# Altium PCB PCB_V1.PcbDoc
Units mm, origin at the board's own origin, x right, y up, seen from the top; angles counter-clockwise.
Board outline 74.31 x 87.25 mm, 4 copper layers (Top Layer, Layer 2, Layer 3, Bottom Layer), stack 0.775 mm thick; 58 components, 48 nets, 175 pads, 9 vias.
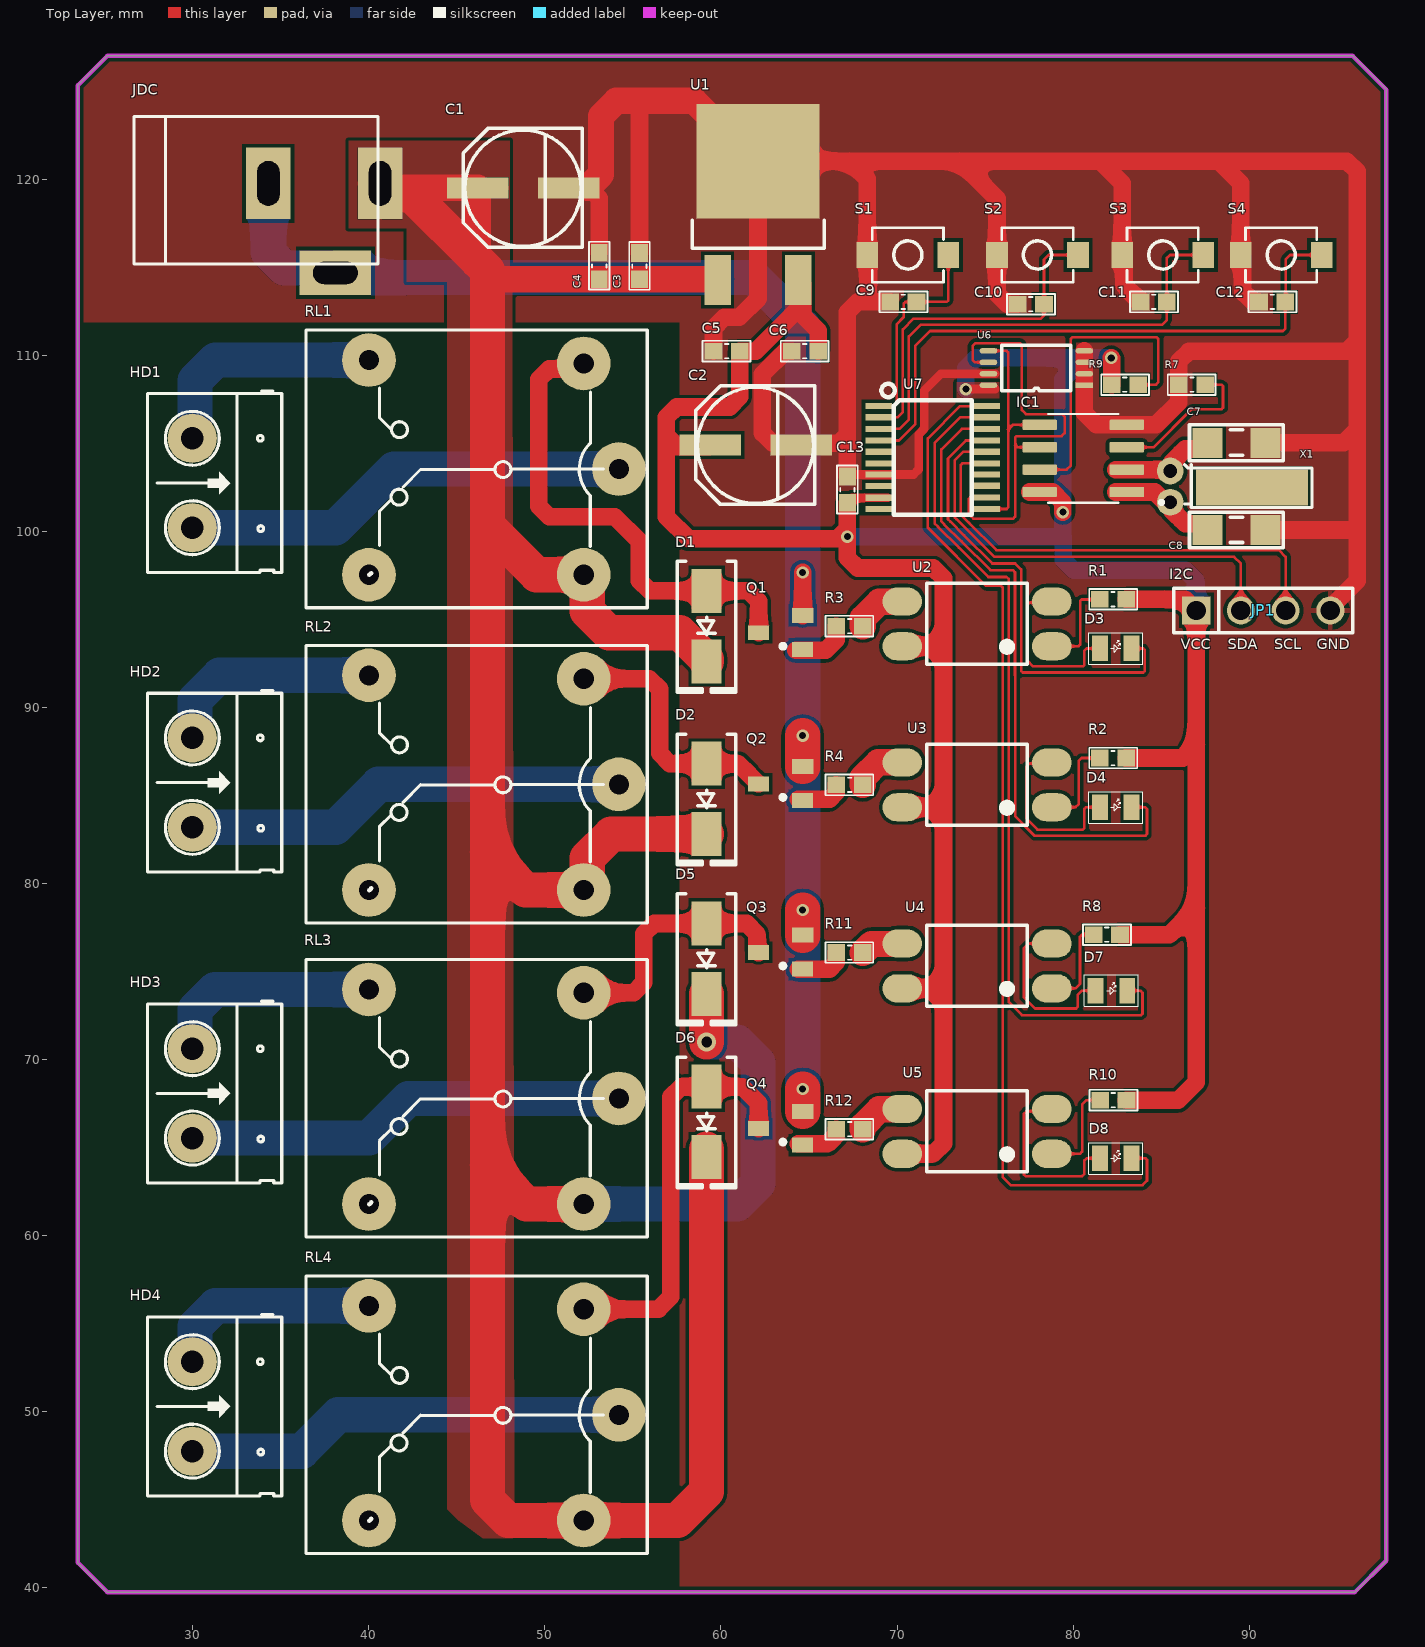
[diagram p0: Top Layer view]
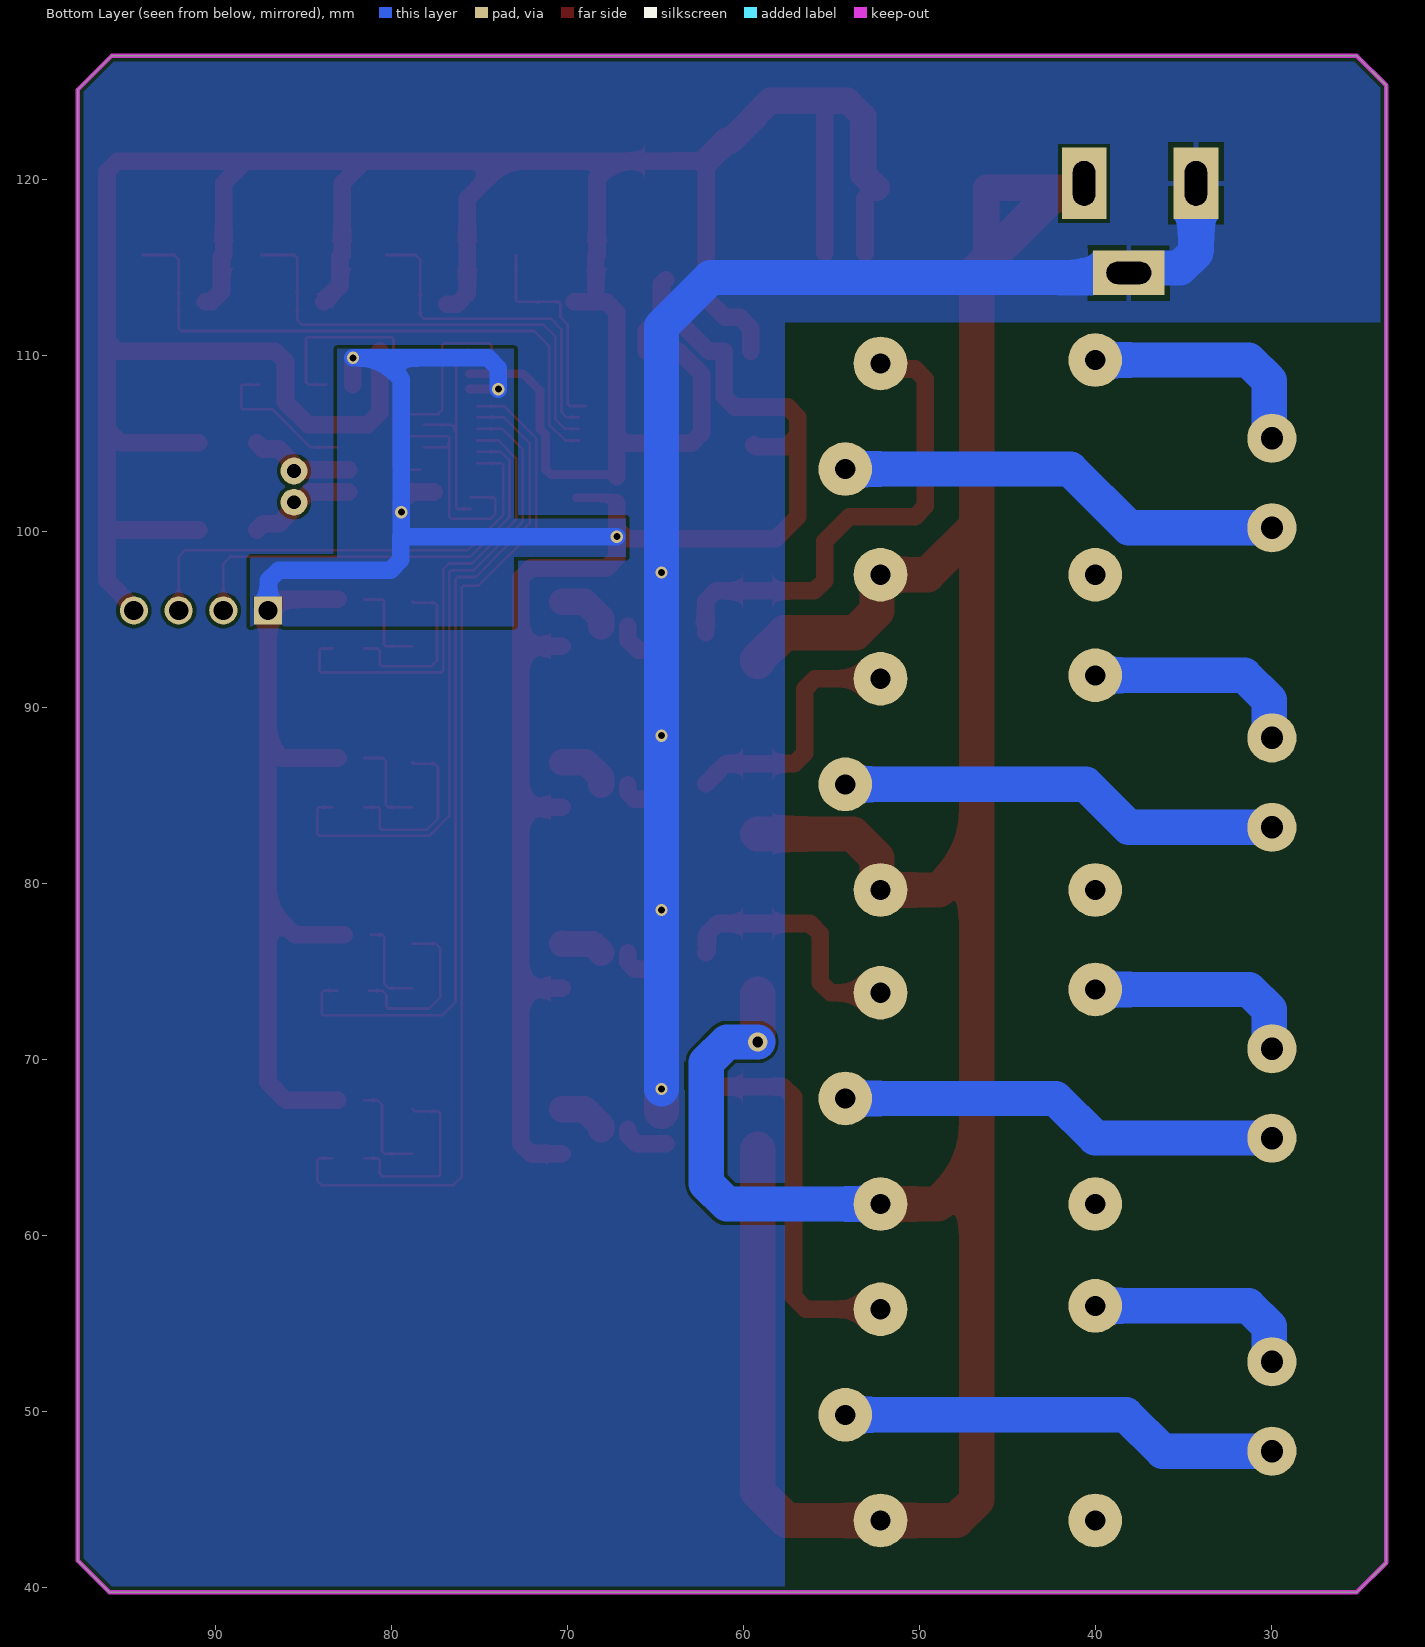
[diagram p1: Bottom Layer view, seen from below]
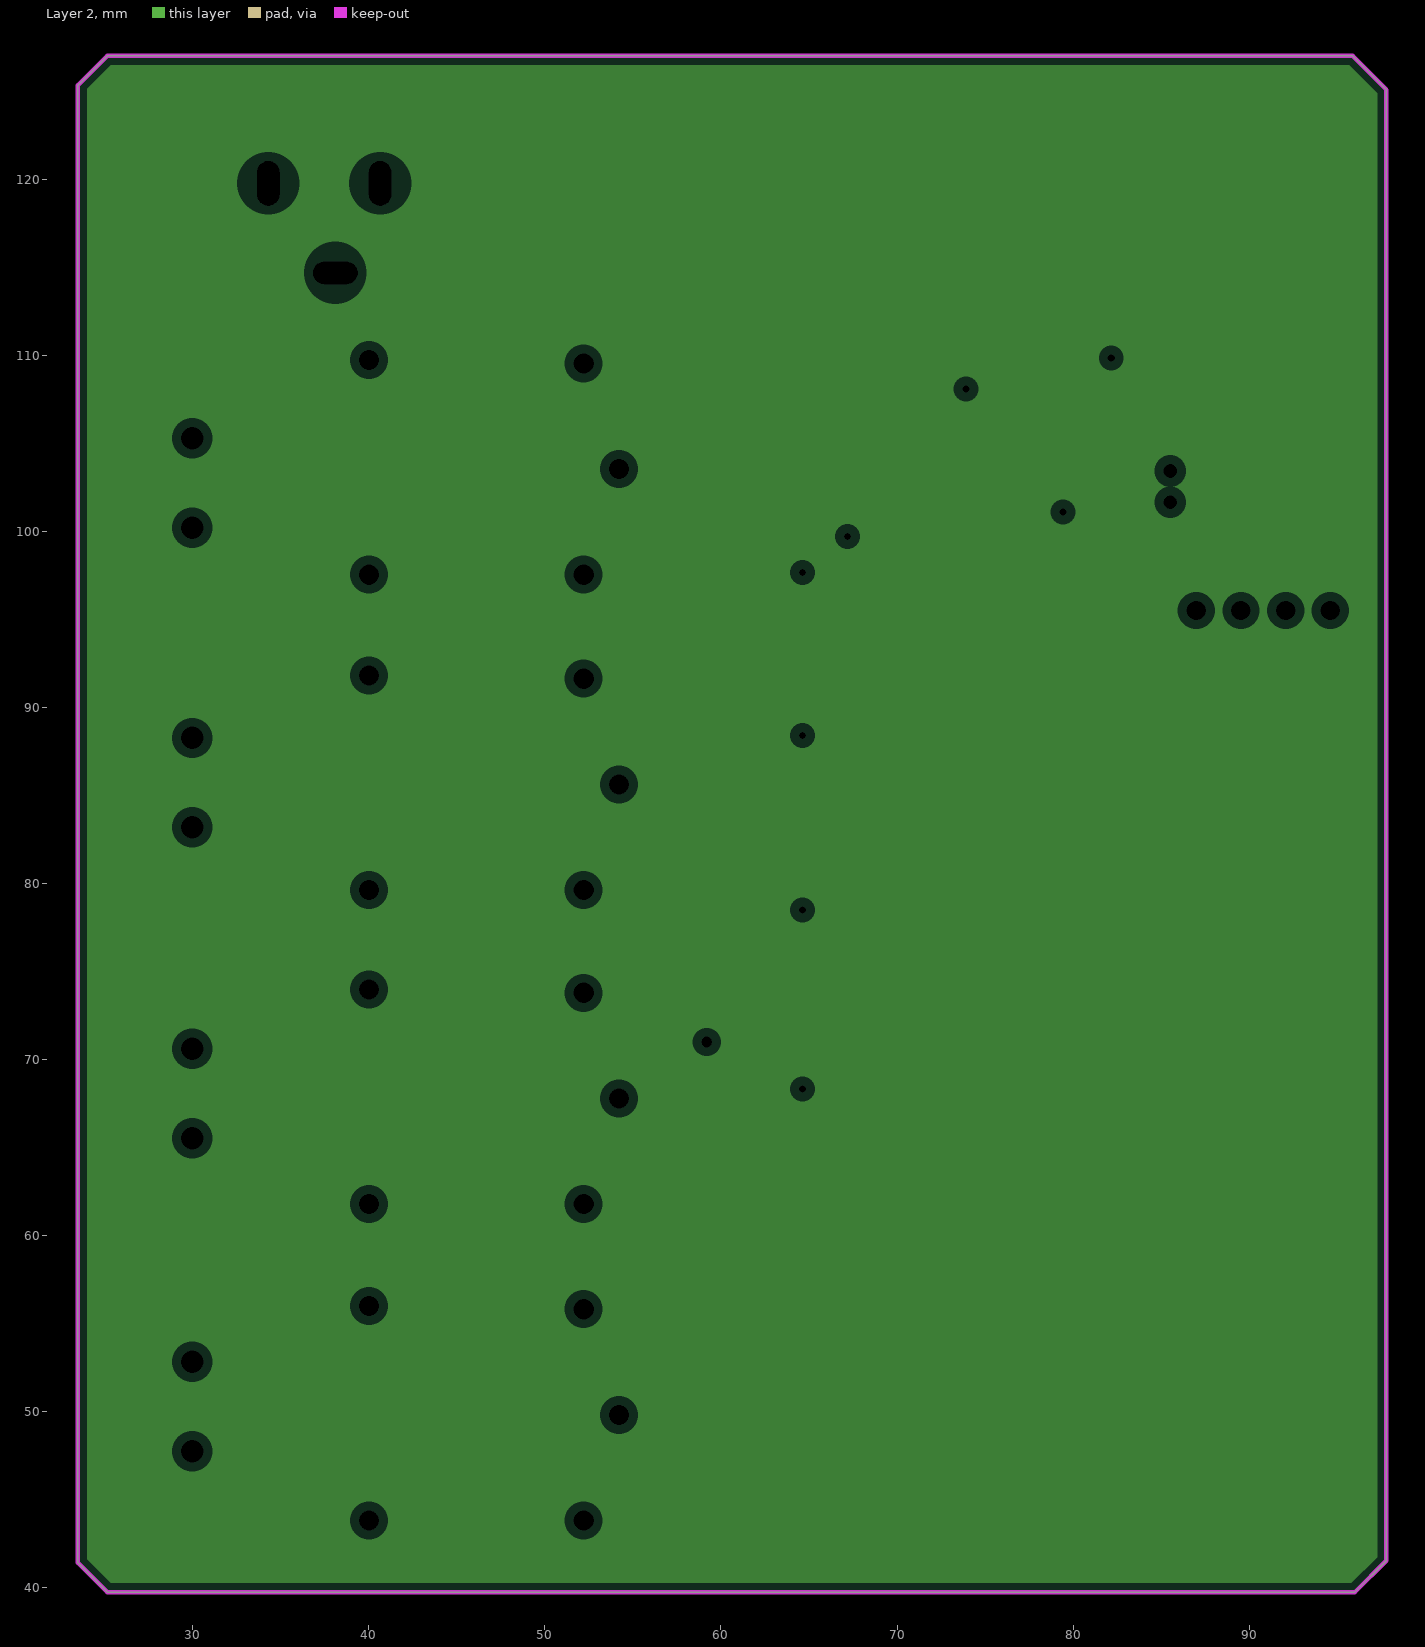
[diagram p2: Layer 2, clearances drawn from the general rule]
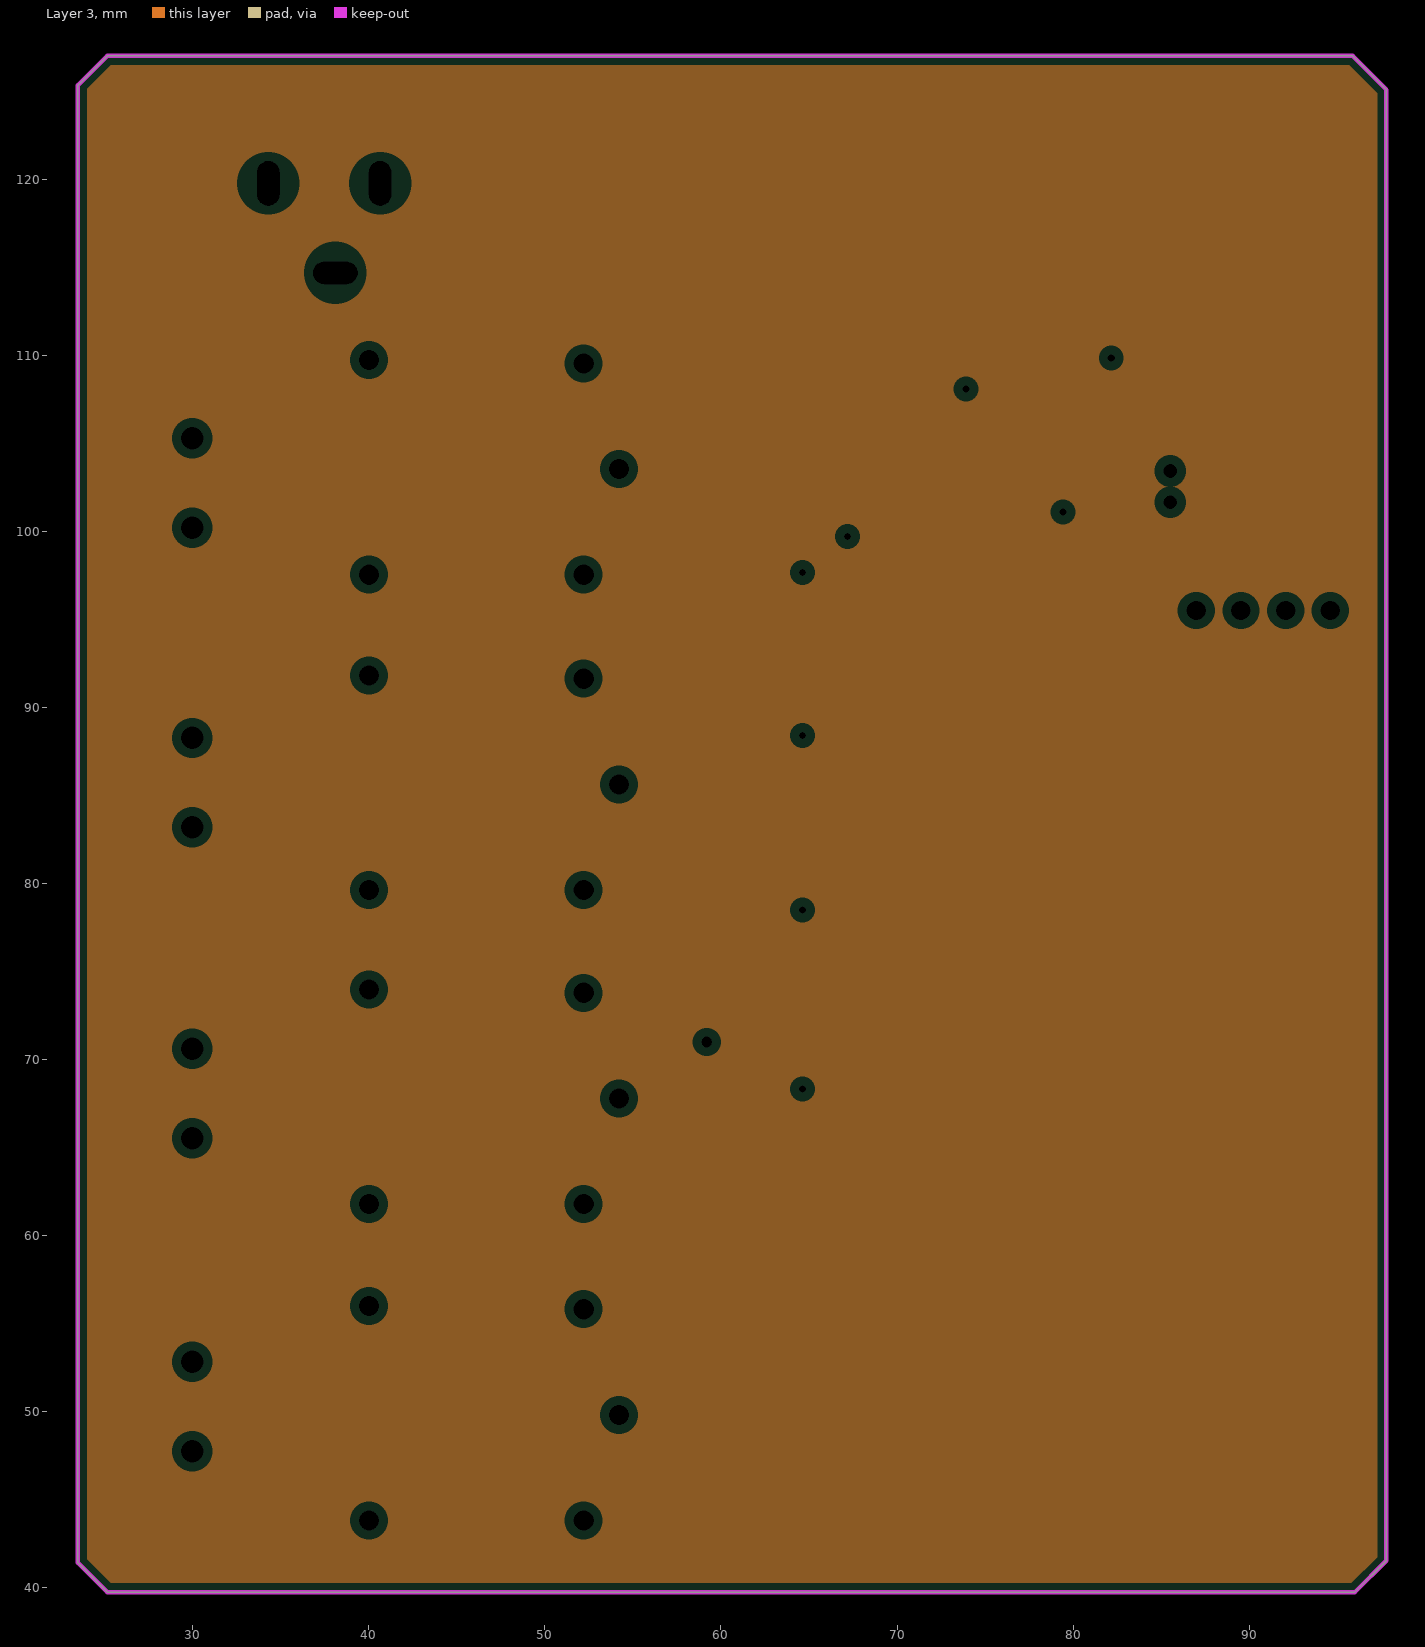
[diagram p3: Layer 3, clearances drawn from the general rule]
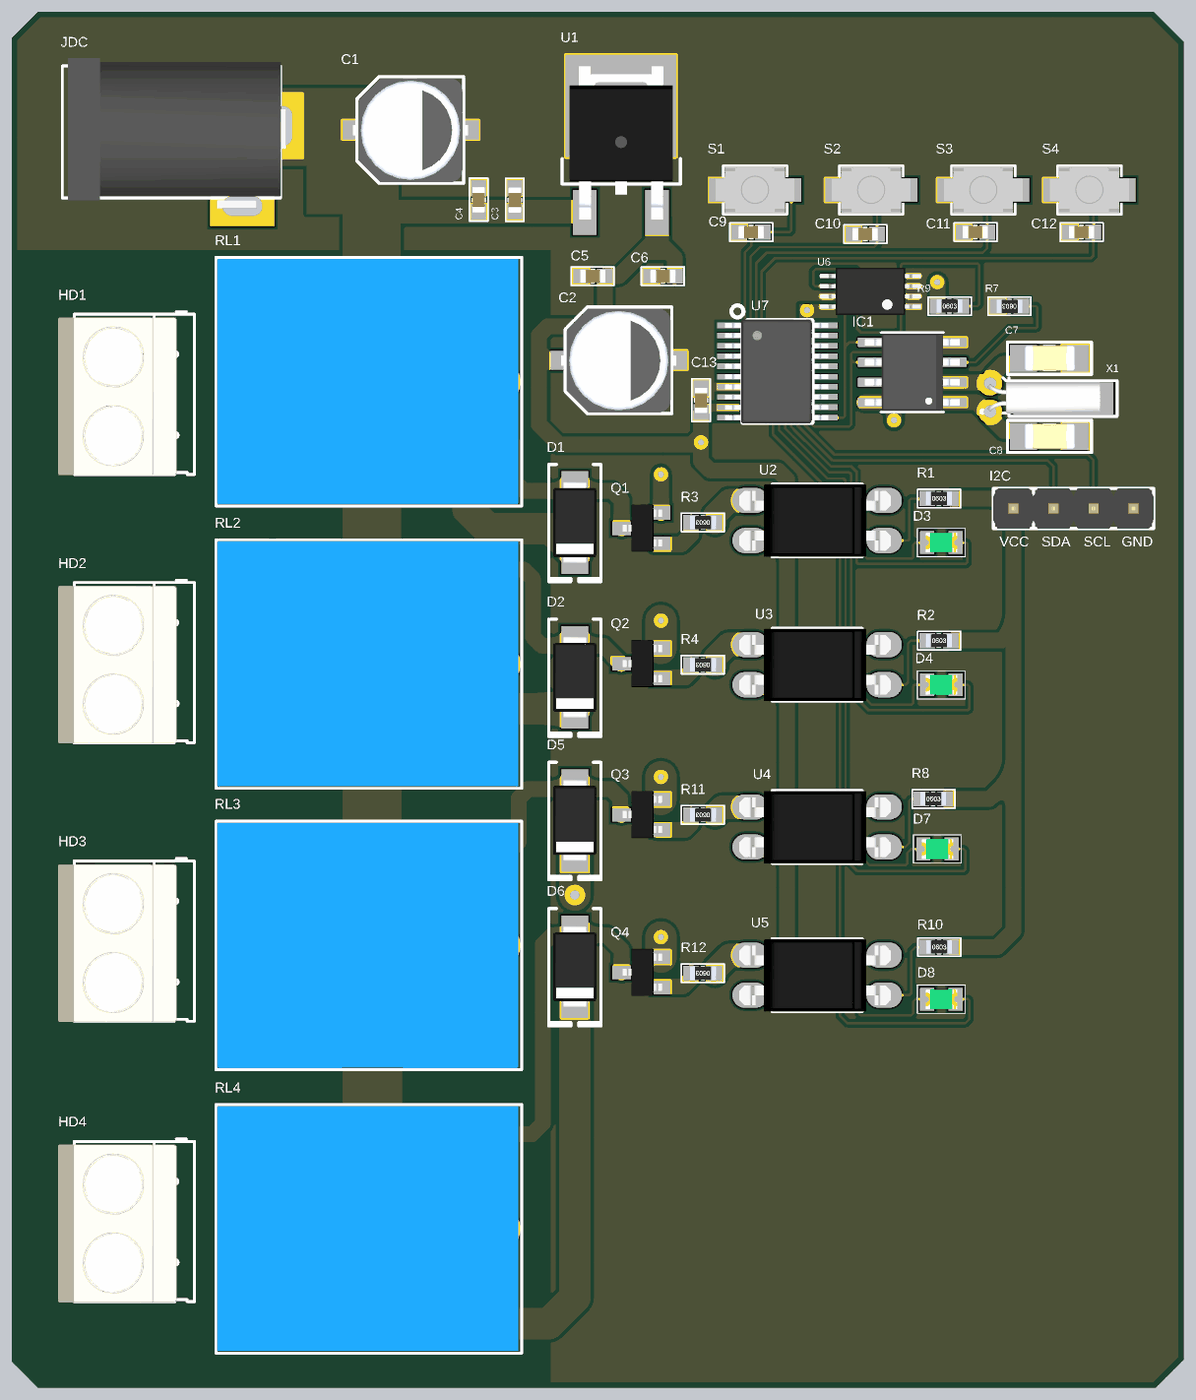
[diagram p4: 3D render of the assembled board from above, using the file's embedded part models]

## Layer stack, top to bottom
Top Solder: solder mask 0.0102, Solder Resist, Dk 3.5
Top Layer: signal copper 0.035
Dielectric 2: core 0.254, Core-028, Dk 4.3
Layer 2: plane copper 0.035
Dielectric 1: prepreg 0.127, PP-017, Dk 4.3
Layer 3: plane copper 0.035
Dielectric 3: core 0.254, Core-028, Dk 4.3
Bottom Layer: signal copper 0.035
Bottom Solder: solder mask 0.0102, Solder Resist, Dk 3.5

## Board outline
25.146,39.751 23.479,41.418 23.479,125.333 25.146,127 95.885,127 97.79,125.095 97.79,41.529 96.012,39.751

## Design rules (kind name [scope] priority, off if disabled: settings)
Clearance [All] p1: gap=0.2 ignorepadtopadclearanceinfootprint=FALSE
PlaneClearance [All] p1: clearance=0.508
PlaneConnect [All] p1: planeconnectstyle=Relief reliefexpansion=0.508 reliefentries=4 reliefconductorwidth=0.254 reliefairgap=0.254
PolygonConnect [All vs InNetClass('GND')] p1: thpad.connectstyle=Relief thpad.reliefconductorwidth=0.3 thpad.reliefentries=4 thpad.polygonreliefangle="90 Angle" thpad.airgapwidth=0.3 smdpad.connectstyle=Direct smdpad.reliefconductorwidth=0.3 smdpad.reliefentries=4 smdpad.polygonreliefangle="90 Angle" smdpad.airgapwidth=0.3 via.connectstyle=Relief via.reliefconductorwidth=0.3 via.reliefentries=4 via.polygonreliefangle="90 Angle" via.airgapwidth=0.3
RoutingVias RoutingVias_Power [InNetClass('Power')] p1: holewidth=0.4 width=0.7 viastyle="Through Hole" minholewidth=0.4 minwidth=0.7 maxholewidth=0.6 maxwidth=1.1
RoutingVias RoutingVias_Signal [All] p2: holewidth=0.4 width=0.7 viastyle="Through Hole" minholewidth=0.4 minwidth=0.7 maxholewidth=0.4 maxwidth=0.7
SolderMaskExpansion [All] p1: expansion=0.102 istentingtop=FALSE
Width Width_Power [InNetClass('Power')] p1: maxlimit=2 minlimit=0.3 preferedwidth=0.5
Width Width_Signal [All] p2: maxlimit=0.5 minlimit=0.15 preferedwidth=0.15
28 further rules are at their usual default settings.

## Classes and differential pairs
net class GND: GND_A GND_B
net class Power: 12VDC +5V GND_A GND_B NetC7_1 NetC8_1 NetD1_1 NetD2_1 NetD5_1 NetD6_1 NetHD1_1 NetHD1_2 NetHD2_1 NetHD2_2 NetHD3_1 NetHD3_2 NetHD4_1 NetHD4_2 NetQ1_1 NetQ2_1 NetQ3_1 NetQ4_1 NetR3_1 NetR4_1 NetR11_1 NetR12_1

## Components (designator, comment, footprint, x,y, rotation, side; value= is the part's Value field where it differs from the comment)
C1 "100uF/16V" ALUMINUM_7mm 48.768,119.507 r90 top
C2 "100uF/16V" ALUMINUM_7mm 61.976,104.902 r90 top
C3 "104" "tu 0603" 55.372,115.062 r90 top
C4 "103" "tu 0603" 53.086,115.074 r90 top
C5 "103" "tu 0603" 60.325,110.236 r180 top
C6 "104" "tu 0603" 64.77,110.236 r180 top
C7 "22pF" "tu 1206" 89.281,105.029 r0 top
C8 "22pF" "tu 1206" 89.281,100.076 r0 top
C9 "104" "tu 0603" 70.358,113.03 r0 top
C10 "104" "tu 0603" 77.597,112.903 r0 top
C11 "104" "tu 0603" 84.582,113.03 r0 top
C12 "104" "tu 0603" 91.313,113.03 r0 top
C13 "104" "tu 0603" 67.183,102.362 r90 top
D1 "1N4007" "DIODE SMA" 59.182,94.615 r270 top
D2 "1N4007" "DIODE SMA" 59.182,84.804 r270 top
D3 "LED_0805_GREEN" LED_0805_GREEN 82.429,93.345 r270 top
D4 "LED_0805_GREEN" LED_0805_GREEN 82.429,84.328 r270 top
D5 "1N4007" "DIODE SMA" 59.182,75.724 r270 top
D6 "1N4007" "DIODE SMA" 59.182,66.453 r270 top
D7 "LED_0805_GREEN" LED_0805_GREEN 82.18,73.914 r270 top
D8 "LED_0805_GREEN" LED_0805_GREEN 82.429,64.389 r270 top
HD1 "220VAC" HED2 29.972,105.283 r270 top value="Header 2"
HD2 "220VAC" HED2 29.972,88.265 r270 top value="Header 2"
HD3 "220VAC" HED2 29.972,70.612 r270 top value="Header 2"
HD4 "220VAC" HED2 29.972,52.832 r270 top value="Header 2"
IC1 "DS1307" DS1307 82.617,101.567 r180 top
JDC "Jac DC 12V" DC-IN 37.465,117.221 r0 top value="Jac DC"
JP1 "I2C" "JP 1x4 DT" 86.995,95.504 r0 top
Q1 "C1815 HF SMD" SOT23 63.393,94.234 r90 top value=C9014
Q2 "C1815 HF SMD" SOT23 63.393,85.649 r90 top value=C9014
Q3 "C1815 HF SMD" SOT23 63.393,76.073 r90 top value=C9014
Q4 "C1815 HF SMD" SOT23 63.393,66.071 r90 top value=C9014
R1 "330R" "tro smd 0603" 82.271,96.139 r0 top
R2 "330R" "tro smd 0603" 82.271,87.122 r0 top
R3 "2.2k" "tro smd 0603" 67.31,94.615 r180 top
R4 "2.2k" "tro smd 0603" 67.31,85.598 r180 top
R7 "10k" "tro smd 0603" 86.753,108.331 r180 top
R8 "330R" "tro smd 0603" 81.915,77.089 r0 top
R9 "4.7k" "tro smd 0603" 82.943,108.331 r0 top
R10 "330R" "tro smd 0603" 82.284,67.691 r0 top
R11 "2.2k" "tro smd 0603" 67.31,76.073 r180 top
R12 "2.2k" "tro smd 0603" 67.31,66.04 r180 top
RL1 "Relay" "Relay 5 Chan SRD" 54.205,103.536 r180 top
RL2 "Relay" "Relay 5 Chan SRD" 54.205,85.629 r180 top
RL3 "Relay" "Relay 5 Chan SRD" 54.205,67.787 r180 top
RL4 "Relay" "Relay 5 Chan SRD" 54.205,49.815 r180 top
S1 "PUSH_BUTTON_SMD_3X4X2" PUSH_BUTTON_SMD_3X4X2 70.612,115.697 r180 top
S2 "PUSH_BUTTON_SMD_3X4X2" PUSH_BUTTON_SMD_3X4X2 77.978,115.697 r180 top
S3 "PUSH_BUTTON_SMD_3X4X2" PUSH_BUTTON_SMD_3X4X2 85.09,115.697 r180 top
S4 "PUSH_BUTTON_SMD_3X4X2" PUSH_BUTTON_SMD_3X4X2 91.821,115.697 r180 top
U1 "L7805CDT-TR" DPAK_118_446_112X59_SMD 61.976,118.304 r90 top
U2 "OPTO PC817 SMD" SOP4 74.549,94.742 r180 top value=PC817
U3 "OPTO PC817 SMD" SOP4 74.549,85.598 r180 top value=PC817
U4 "OPTO PC817 SMD" SOP4 74.549,75.311 r180 top value=PC817
U5 "OPTO PC817 SMD" SOP4 74.549,65.913 r180 top value=PC817
U6 "AT24C02 - TSSOP8" AT24C02 80.645,108.301 r180 top
U7 "CH32V003F4P6" CH32V003F4P6 74.295,107.547 r270 top
X1 "32,768 Khz" XT32kn 85.446,101.219 r0 top value=32,768khz

## Footprints (in the part's own frame and the unit in brackets; to place one, negate y for a bottom-side part, rotate by r counter-clockwise, add the part's x,y. Pads: shape width x height; smd on the part's side, far side on the other; paste and mask are expansions set on the pad)
ALUMINUM_7mm [mm] "ALUMINUM CAPACITOR 7mm"
  rect 1.2x3.5 smd: 1(0,2.58) 2(0,-2.58)
  silkscreen extent -3.38,-3.36 3.38,3.4, body extent -3.32,-3.64 3.28,3.66, height 5.8
AT24C02 [mm] "TSSOP-8"
  rect 1x0.3 smd mask+0.05: 1(0,0)
  oval 1x0.3 smd mask+0.05: 2(0,-0.65) 3(0,-1.3) 4(0,-1.95) 5(5.45,-1.95) 6(5.45,-1.3) 7(5.45,-0.65) 8(5.45,0)
  silkscreen extent 0.78,-2.28 4.71,0.33, body extent -0.49,-2.47 5.91,0.53, height 1.2
CH32V003F4P6 [mm]
  rect 0.351x1.501 smd paste+0 mask+0.051: 1(0.435,-5.334) 2(1.07,-5.334) 3(1.731,-5.334) 4(2.391,-5.334) 5(3.026,-5.334) 6(3.687,-5.334) 7(4.322,-5.334) 8(4.982,-5.334) 9(5.642,-5.334) 10(6.277,-5.334) 11(6.277,0.812) 12(5.617,0.812) 13(4.957,0.812) 14(4.322,0.812) 15(3.687,0.812) 16(3.026,0.812) 17(2.391,0.812) 18(1.731,0.812) 19(1.07,0.812) 20(0.435,0.812)
  silkscreen extent -0.83,-5.18 6.61,-0.05, body extent 0.05,-5.59 6.65,0.96, height 1.2
DC-IN [mil] "Jac DC input"
  rect 100x160 hole 50 slot 100 at 90 deg: 1(125,100) 2(-125,100)
  rect 160x100 hole 50 slot 100 at 0 deg: 3(25,-100)
  silkscreen extent -425,-80 120,250, body extent -410,-105 134,269, height 434
"DIODE SMA" [mm] "SMA"
  rect 2.5x1.7 smd: 1(-2,0) 2(2,0)
  silkscreen extent -3.68,-1.65 3.75,1.65, body extent -2.6,-1.37 2.6,1.37, height 2.4
DPAK_118_446_112X59_SMD [mm] "CASE: DPAK"
  rect 2.85x1.5 smd: 1(-4.023,2.163) 3(-4.023,-2.417)
  rect 6.5x7 smd: 2(2.727,-0.127)
  silkscreen extent -2.22,-3.9 -0.62,3.6, body extent -4.47,-3.43 5.23,3.15, height 2.3
DS1307 [mm]
  rrect25% 1.97x0.59 smd: 1(-0.438,-0.668) 2(-0.438,-1.938) 3(-0.438,-3.208) 4(-0.438,-4.478) 5(4.512,-4.478) 6(4.512,-3.208) 7(4.512,-1.938) 8(4.512,-0.668)
  silkscreen extent -2.51,-5.09 4.04,0.02, body extent -0.96,-5.02 5.04,-0.12, height 1.75
HED2 [mil] "Header 2, 2 pin, hight 300mil, Pin to Pin 200, Colour Green"
  round 110 hole 50: 1(0,0) 2(200,0)
  silkscreen extent -106,-100 300,200, body extent -92,-140 302,155, height 394
"JP 1x4 DT" [mm] "4 pins, 1 row, straight, gold plating"
  rect 1.6x1.6 hole 1.1: 1(0,0)
  round 1.6 hole 1.1: 2(2.54,0) 3(5.08,0) 4(7.62,0)
  silkscreen extent -1.27,-1.27 8.89,1.27, body extent -1.27,-1.27 8.89,1.27, height 8.54
LED_0805_GREEN [mm]
  rect 1.45x0.9 smd: 1(0,-0.9) 2(0,0.9)
  silkscreen extent -0.89,-1.53 0.9,1.52, body extent -0.62,-1 0.63,1, height 1.1
PUSH_BUTTON_SMD_3X4X2 [mm]
  rect 1.23x1.5 smd: 1(-2.3,0) 2(2.3,0)
  silkscreen extent -2.03,-1.54 2.03,1.54, body extent -2.49,-1.45 2.51,1.45, height 2
"Relay 5 Chan SRD" [mil] "Relay SPDT, 5 pin, 10A,W 650mil, L 800mil, H 800mil"
  round 120 hole 45: 1(0,0) 2(559.06,236.22) 3(559.06,-243.78) 4(78.74,-236.22) 5(78.74,236.22)
  silkscreen extent -63,-311 700,310, body extent -55,-306 697,304, height 602
SOP4 [mm]
  oval 2.25x1.6 smd: 1(-4.25,1.27) 2(-4.25,-1.27) 3(4.25,-1.27) 4(4.25,1.27)
  silkscreen extent -2.85,-2.3 2.85,2.3, body extent -4.67,-2.29 4.93,2.31, height 3.6
SOT23 [mm] "SOT 23 _ 1-3-2"
  rect 0.85x1.2 smd: 1(-0.94,-1.245) 2(0.985,-1.25) 3(0.005,1.25)
  silkscreen extent -0.88,-0.25 -0.64,0, body extent -1.47,-1.33 1.53,1.17, height 1.06
"tro smd 0603" [mm] "Chip Capacitor, 2-Leads, Body 1,60x0,80mm, IPC Medium Density"
  rect 1x0.95 smd mask+0.076: 1(-0.75,0) 2(0.75,0)
  silkscreen extent -1.35,-0.58 1.37,0.58, body extent -0.82,-0.42 0.82,0.43, height 0.44
"tu 0603" [mm] "Chip Capacitor, 2-Leads, Body 1,60x0,80mm, IPC Medium Density"
  rect 1x0.95 smd mask+0.076: 1(-0.75,0) 2(0.75,0)
  silkscreen extent -1.35,-0.58 1.37,0.58, body extent -0.8,-0.4 0.8,0.4, height 0.9
"tu 1206" [mm]
  rect 1.7x1.7 smd: 1(-1.65,0) 2(1.65,0)
  silkscreen extent -2.67,-1.02 2.67,1.02, body extent -1.57,-0.8 1.63,0.8, height 0.94
XT32kn [mil] "Crystal for 32,768kHz, 2pin"
  round 60 hole 31: 1(3,17) 2(3,87)
  rect 250x80 smd: 3(186,50)
  silkscreen extent 35,5 320,101, body extent -3,12 279,91, height 90

## Part data
C1 C2: "Aluminum Capacitor 100uF/16V 7mm"
C3 C4 C5 C6 C9 C10 C11 C12 C13: library part "Tu 0603 104 50V 10%", "Dán", Chung_Loai=Dán, Don_Vi=Con, Ma_Hang=MH004568, So_Chan=2, Ten_Linh_Kien="Tụ 0603 104-100nF 10% 50V"
C7 C8: library part "Tu 1206 22pF 50V 10%", "Dán", Chung_Loai=Dán, Don_Vi=Con, Ma_Hang=MH004547, So_Chan=2, Ten_Linh_Kien="Tụ 1206 22P 10% 50V"
D1 D2 D5 D6: library part "Diode M7 ( 4007 )", "Dán", Chung_Loai=Dán, Don_Vi=Con, Ma_Hang=MH000944, Ten_Linh_Kien="Diode M7 1N4007 SMD 1A 1000V"
D3 D4 D7 D8: "LED 0805 Green.", JLCPCB PN=C2297
HD1 HD2 HD3 HD4: library part Hed2, "Header 2 (Green)"
JDC: library part DCIN, "Jac DC input"
JP1: library part "JP 1x4 2.54 Duc Thang", "Cắm", Chung_Loai=Cắm, Don_Vi=Con, Ma_Hang=MH000903, Ten_Linh_Kien="Jump Đơn Đực 2.54MM 1x40P Thẳng 11MM"
Q1 Q2 Q3 Q4: "NPN transistor"
R1 R2 R8 R10: library part "Tro 0603 5% 330R", "Dán", Chung_Loai=Dán, Don_Vi=Con, Ma_Hang=MH006910, So_Chan=2, Ten_Linh_Kien="Trở 0603 5% 330R"
R3 R4 R11 R12: library part "Tro 0603 5% 2.2k", "Dán", Chung_Loai=Dán, Don_Vi=Con, Ma_Hang=MH006321, So_Chan=2, Ten_Linh_Kien="Trở 0603 5% 2.2k"
R7: library part "Tro 0603 1% 10k", "Dán", Chung_Loai=Dán, Don_Vi=Con, Ma_Hang=MH006333, So_Chan=2, Ten_Linh_Kien="Trở 0603 1% 10k"
R9: library part "Tro 0603 5% 4.7k", "Dán", Chung_Loai=Dán, Don_Vi=Con, Ma_Hang=MH006327, So_Chan=2, Ten_Linh_Kien="Trở 0603 5% 4.7k"
RL1 RL2 RL3 RL4: library part "Relay 5 Chan SRD", "Relay 5 Chan", Ma_Hang=MH009374, Ten="Relay 5V10A SRD-05VDC-SL-C Chính Hãng"
S1 S2 S3 S4: "Push Button Tactile Switch SMD 2 Pins 3x4x2mm.", JLCPCB PN=C231644
U1: library part REG_35V_5V-1.5A-7.5W-DPAK, "Linear Voltage Regulator IC 1 Output 1.5A DPAK", Alternate Part Number-1="CJ7805 3%", Case/Package=DPAK, Manufacturer=Diodes, Manufacturer Part Number=L7805CDT-TR, Supplier Part Number-1=L7805CDT-TR, Supplier-1="SP ROAD"
U2 U3 U4 U5: "Single Opto"
U6: library part AT24C02
X1: library part XT32k, "Crystal 32,768kHz for timer real"

## Via types
v1: diameter 0.7, hole 0.4, Top Layer to Bottom Layer, 8 vias
v2: diameter 1.1, hole 0.6, Top Layer to Bottom Layer, 1 vias

## Nets (pads, with @x,y where several pads share a name; then routed paths per layer and width w, separated by ;. In a path a pad name is that pad's centre, name@x,y a point inside that pad or via, vN(x,y) a via of type N, cw(c..) or ccw(c..) an arc to the next point about the centre after c; other vN are vias at no path point)
12VDC: C1.1 C3.1 C4.1 D1.2 D2.2 D5.2 D6.2 JDC.1 RL1.5 RL2.5 RL3.5 RL4.5 U1.1 | length 197.4
  Top Layer w1.5: JDC.1 40.894,119.507 C1.1 46.188,115.356 46.188,115.102 46.736,114.554 ; 46.966,114.324 C4.1 C3.1@55.372,114.324 ; C3.1 U1.1@59.813,114.312
  Top Layer w2: JDC.1 40.64,119.388 40.91,119.118 42.426,119.118 46.188,115.356 46.736,114.808 46.736,114.554 ; 46.966,114.324 46.736,114.554 ; RL3.5 48.957,61.787 46.736,64.008 ; D6.2@59.182,64.897 D6.2 59.182,45.466 57.531,43.815 RL4.5 47.908,43.815 46.736,44.987 46.736,64.008 ; v2(59.182,70.993) D5.2 ; D2.2 53.771,82.804 52.406,81.438 52.406,79.83 RL2.5 48.895,79.629 46.736,81.788 ; D1.2 59.182,92.715 57.663,94.234 53.644,94.234 52.406,95.473 52.406,97.335 RL1.5 49.53,97.536 46.736,100.33 ; 46.736,64.008 46.736,81.788 ; 46.736,81.788 46.736,100.33 ; 46.736,100.33 46.736,114.554
  Bottom Layer w2: RL3.5 60.931,61.787 62.103,62.959 62.103,69.821 60.931,70.993 v2(59.182,70.993)
+5V: C2.1 C5.1 C6.1 C13.1 IC1.8 JP1.1 R1.2 R2.2 R8.2 R9.1 R10.2 U1.3 U2.4 U3.4 U4.4 U5.4 U6.8 U7.9 | length 182.6
  Top Layer w0.5: C13.1@67.451,101.905 U7.9 U7.9@69.469,101.905 ; v1(73.914,108.077) 75.565,108.077
  Top Layer w1: 57.355,105.002 56.896,105.461 ; 57.482,104.802 59.296,104.802 C2.1 ; U1.3 64.643,114.031 U1.3@64.643,112.907 ; C6.1 65.52,111.391 64.643,112.268 U1.3@64.643,112.907 ; C13.1 67.183,100.154 ; U5.4 72.058,64.643 72.644,65.229 72.644,74.041 ; U4.4 72.644,74.041 ; U3.4 72.644,84.328 ; U2.4 72.644,93.472 ; IC1.8@77.549,102.235 IC1.8 78.833,102.235 79.419,101.649 v1(79.419,101.092) ; v1(82.169,109.855) 82.193,109.831 R9.1 ; R8.2 85.471,77.089 86.995,78.613 ; R2.2 86.233,87.122 86.995,87.884 ; R1.2 86.36,96.139 JP1.1 86.995,87.884 ; R10.2 85.979,67.691 86.995,68.707 86.995,78.613 ; 56.896,105.461 56.896,106.475 57.482,107.061 60.489,107.061 61.075,107.647 61.075,109.859 C5.1 61.972,110.236 U1.3@64.643,112.907 ; 56.896,105.461 56.896,100.838 58.166,99.568 66.597,99.568 67.183,100.154 ; 67.183,100.154 v1(67.183,99.695) 67.183,98.503 67.769,97.917 72.058,97.917 72.644,97.331 72.644,93.472 ; 72.644,74.041 72.644,84.328 ; 72.644,84.328 72.644,93.472 ; 86.995,78.613 86.995,87.884
  Bottom Layer w1: v1(67.183,99.695) 79.248,99.695 79.419,99.866 v1(79.419,101.092) 79.419,108.629 80.645,109.855 ; v1(73.914,108.077) 73.914,109.269 74.5,109.855 80.645,109.855 ; 79.451,99.695 79.451,98.376 80.037,97.79 86.388,97.79 86.974,97.204 86.974,95.804 86.995,95.783 JP1.1 ; v1(82.169,109.855) 80.645,109.855
BUTTON_1: C9.2 S1.1 U7.1 | length 12.1
  Top Layer w0.15: U7.1 68.967,107.118 69.849,107.118 69.977,107.246 69.977,111.76 70.383,112.166 70.383,112.942 70.471,113.03 C9.2 72.824,113.03 72.912,113.118 S1.1
BUTTON_2: C10.2 S2.1 U7.2 | length 19.4
  Top Layer w0.15: U7.2@69.342,106.477 70.028,106.477 70.327,106.776 70.327,111.475 70.928,112.076 78.167,112.076 78.347,112.256 C10.2 78.347,115.431 78.613,115.697 S2.1
BUTTON_3: C11.2 S3.1 U7.3 | length 27
  Top Layer w0.15: U7.3@69.342,105.816 70.129,105.816 70.677,106.364 70.677,111.063 71.34,111.726 85.056,111.726 85.332,112.002 C11.2 85.332,115.521 85.508,115.697 S3.1
BUTTON_4: C12.2 S4.1 U7.4 | length 34
  Top Layer w0.15: U7.4@69.342,105.156 70.104,105.156 71.027,106.079 71.027,110.524 71.879,111.376 91.921,111.376 92.063,111.518 C12.2 92.075,113.042 92.075,115.443 92.329,115.697 S4.1
GND_A: C1.2 C2.2 C3.2 C4.2 C5.2 C6.2 C7.2 C8.2 C9.1 C10.1 C11.1 C12.1 C13.2 IC1.4 JP1.4 R7.2 S1.2 S2.2 S3.2 S4.2 U1.2 U6.1 U6.2 U6.3 U6.4 U6.7 U7.7 | length 205.8
  Top Layer w0.5: C13.2 67.297,103.226 U7.7 70.937,103.226 71.23,103.518 71.23,105.5 71.552,105.822 71.552,108.001 72.502,108.951 U6.7 U6.7@75.565,108.951
  Top Layer w1: C1.2@52.424,119.507 52.498,119.507 53.086,118.919 C4.2 ; C3.2 55.372,124.46 ; C5.2 59.575,111.543 60.188,112.156 61.037,112.156 62.103,113.222 U1.2 67.31,121.031 ; C6.2 63.669,110.236 62.357,108.924 62.357,105.588 62.943,105.002 64.456,105.002 C2.2 64.656,105.002 66.697,105.002 67.183,105.488 ; C13.2 67.183,105.002 67.183,105.488 ; C9.1 68.37,113.03 ; C10.1 76.264,112.903 75.678,113.489 S2.2 75.678,118.886 73.533,121.031 ; U6.4 U6.3 U6.2 80.645,106.73 81.33,106.045 84.709,106.045 86.003,107.339 R7.2 86.003,109.65 86.589,110.236 95.553,110.236 96.139,110.822 ; C11.1 82.905,113.957 82.905,115.582 S3.2 82.79,119.775 81.534,121.031 ; C12.1 90.222,113.03 89.636,113.616 89.636,115.582 S4.2 89.521,119.775 88.265,121.031 ; C8.2 96.139,100.076 ; C7.2 95.377,105.029 96.139,105.791 ; JP1.4 94.615,95.666 96.139,97.19 96.139,100.076 ; 67.183,105.488 67.183,112.444 67.769,113.03 68.37,113.03 ; 67.31,121.031 73.533,121.031 ; 67.31,121.031 68.312,120.029 S1.2 68.37,115.639 68.37,113.03 ; 73.533,121.031 81.534,121.031 ; 81.534,121.031 88.265,121.031 ; 88.265,121.031 95.553,121.031 96.139,120.445 96.139,110.822 ; 96.139,100.076 96.139,105.791 ; 96.139,105.791 96.139,110.822
  Top Layer w1.5: C1.2@52.424,119.507 53.185,120.268 53.185,123.581 54.064,124.46 55.372,124.46 58.474,124.46 59.353,123.581 59.353,123.531 60.71,122.174 60.96,122.174 U1.2
GND_B: JDC.2 JDC.3 Q1.2 Q2.2 Q3.2 Q4.2 | length 86.2
  Top Layer w1: Q1.2 v1(64.643,97.663)
  Top Layer w2: Q4.2 v1(64.643,68.326) ; Q3.2 v1(64.643,78.486) ; Q2.2 v1(64.643,88.392)
  Bottom Layer w2: JDC.2 34.29,115.853 35.192,114.951 37.83,114.951 JDC.3 38.37,114.411 61.865,114.411 64.643,111.633 v1(64.643,97.663) v1(64.643,88.392) v1(64.643,78.486) v1(64.643,68.326)
NetC7_1: C7.1 IC1.2 X1.2 | length 6.1
  Top Layer w1: IC1.2@82.423,103.505 X1.2@85.522,103.505 ; X1.2 85.622,103.529 85.622,103.931 86.37,104.679 87.281,104.679 C7.1
NetC8_1: C8.1 IC1.1 X1.1 | length 5.8
  Top Layer w1: IC1.1@82.423,102.235 84.648,102.235 85.132,101.751 85.422,101.751 X1.1 ; X1.1@85.622,101.174 86.37,100.426 87.281,100.426 C8.1
NetD1_1: D1.1 Q1.3 RL1.4 | length 28
  Top Layer w1: RL1.4 51.891,109.222 50.243,109.222 49.657,108.636 49.657,101.424 50.243,100.838 53.975,100.838 55.372,99.441 55.372,97.201 55.958,96.615 61.557,96.615 62.143,96.029 Q1.3
NetD2_1: D2.1 Q2.3 RL2.4 | length 14.6
  Top Layer w1: RL2.4 55.929,91.629 56.515,91.043 56.515,87.39 57.101,86.804 60.993,86.804 61.579,86.218 61.579,86.193 62.118,85.654 Q2.3
NetD3_1: D3.1 U2.2 | length 9.8
  Top Layer w0.15: U2.2 78.739,95.952 77.537,95.952 77.399,95.814 77.399,92.654 77.724,92.329 80.557,92.329 80.645,92.417 80.645,93.218 80.772,93.345 D3.1
NetD4_1: D4.1 U3.2 | length 10.1
  Top Layer w0.15: U3.2 78.739,86.808 77.537,86.808 77.343,86.614 77.343,83.693 77.978,83.058 80.557,83.058 80.645,83.146 80.645,84.24 80.733,84.328 D4.1
NetD5_1: D5.1 Q3.3 RL3.4 | length 14.4
  Top Layer w1: RL3.4 55.04,73.787 55.626,74.373 55.626,77.138 56.212,77.724 D5.1 61.457,77.724 62.043,77.138 62.043,76.153 62.118,76.078 Q3.3
NetD6_1: D6.1 Q4.3 RL4.4 | length 23.7
  Top Layer w1: RL4.4 56.45,55.815 57.15,56.515 57.15,67.867 57.736,68.453 D6.1 61.214,68.453 62.143,67.524 Q4.3
NetD7_1: D7.1 U4.2 | length 9.6
  Top Layer w0.15: U4.2 77.47,76.581 77.216,76.327 77.216,73.533 77.851,72.898 80.176,72.898 80.264,72.986 80.264,73.66 80.518,73.914 D7.1
NetD8_1: D8.1 U5.2 | length 10.4
  Top Layer w0.15: U5.2 78.672,67.056 77.343,67.056 77.216,66.929 77.216,63.461 77.304,63.373 80.518,63.373 80.645,63.5 80.645,64.262 80.772,64.389 D8.1
NetHD1_1: HD1.1 RL1.3 | length 13.7
  Bottom Layer w2: HD1.1 30.124,105.435 30.124,108.556 31.295,109.728 RL1.3
NetHD1_2: HD1.2 RL1.1 | length 25.6
  Bottom Layer w2: HD1.2 38.1,100.203 41.433,103.536 RL1.1
NetHD2_1: HD2.1 RL2.3 | length 12.7
  Bottom Layer w2: HD2.1 30.124,88.417 30.124,90.42 31.525,91.821 RL2.3
NetHD2_2: HD2.2 RL2.1 | length 25.2
  Bottom Layer w2: HD2.2 38.1,83.185 40.544,85.629 RL2.1
NetHD3_1: HD3.1 RL3.3 | length 12.6
  Bottom Layer w2: HD3.1 30.124,70.764 30.124,72.832 31.271,73.979 RL3.3
NetHD3_2: HD3.2 RL3.1 | length 25.2
  Bottom Layer w2: HD3.2 40.005,65.532 42.26,67.787 RL3.1
NetHD4_1: HD4.1 RL4.3 | length 12.4
  Bottom Layer w2: HD4.1 30.124,52.984 30.124,54.835 31.295,56.007 RL4.3
NetHD4_2: HD4.2 RL4.1 | length 25.1
  Bottom Layer w2: HD4.2 36.195,47.752 38.258,49.815 RL4.1
NetIC1_3: IC1.3 R7.1 | length 8.7
  Top Layer w0.15: IC1.3 84.582,104.775 86.741,106.934 88.431,106.934 88.519,107.022 88.519,108.243 88.431,108.331 R7.1
NetIC1_7: IC1.7 R9.2 | length 17.5
  Top Layer w0.15: IC1.7@78.359,103.505 79.629,103.505 79.87,103.746 79.87,110.938 79.958,111.026 84.748,111.026 84.836,110.938 84.836,108.458 84.709,108.331 R9.2
NetQ1_1: Q1.1 R3.2 | length 3.3
  Top Layer w1: Q1.1@64.262,93.235 65.949,93.235 66.56,93.846 R3.2
NetQ2_1: Q2.1 R4.2 | length 2.8
  Top Layer w1: Q2.1@64.389,84.784 66.176,84.784 66.56,85.168 R4.2
NetQ3_1: Q3.1 R11.2 | length 2.9
  Top Layer w1: Q3.1@64.389,75.122 66.166,75.122 66.56,75.516 R11.2
NetQ4_1: Q4.1 R12.2 | length 2.7
  Top Layer w1: Q4.1@64.389,65.206 66.049,65.206 66.56,65.716 R12.2
NetR1_1: R1.1 U2.1 | length 5.3
  Top Layer w0.15: U2.1 80.316,93.472 80.404,93.56 80.404,96.036 80.492,96.123 81.505,96.123 R1.1
NetR2_1: R2.1 U3.1 | length 5.3
  Top Layer w0.15: U3.1 80.149,84.328 80.314,84.493 80.314,86.957 80.479,87.122 R2.1
NetR3_1: R3.1 U2.3 | length 3.1
  Top Layer w1.5: R3.1 68.06,95.058 68.995,95.993 70.28,95.993 U2.3
NetR4_1: R4.1 U3.3 | length 3
  Top Layer w1.5: R4.1 68.06,86.008 68.939,86.887 70.28,86.887 U3.3
NetR8_1: R8.1 U4.1 | length 5.2
  Top Layer w0.15: U4.1 80.137,74.041 80.391,74.295 80.391,76.962 80.518,77.089 R8.1
NetR10_1: R10.1 U5.1 | length 5.6
  Top Layer w0.15: U5.1 80.391,64.643 80.518,64.77 80.518,67.437 80.772,67.691 R10.1
NetR11_1: R11.1 U4.3 | length 2.6
  Top Layer w0.15: R11.1 R11.1@68.187,75.946
  Top Layer w1.5: R11.1 68.549,76.562 70.28,76.562 U4.3
NetR12_1: R12.1 U5.3 | length 3.1
  Top Layer w0.15: U5.3@70.075,66.959 U5.3
  Top Layer w1.5: R12.1 68.06,66.229 68.995,67.164 70.28,67.164 U5.3
RELAY_1: D3.2 U7.17 | length 26.2
  Top Layer w0.15: U7.17 73.914,105.156 72.898,104.14 72.898,100.685 73.032,100.551 73.032,100.546 73.808,99.77 73.813,99.77 75.412,98.171 76.708,98.171 77.049,97.83 77.049,92.076 77.146,91.979 83.977,91.979 84.074,92.076 84.074,93.257 83.986,93.345 D3.2
RELAY_2: D4.2 U7.18 | length 36.7
  Top Layer w0.15: U7.18 73.685,105.816 72.517,104.648 72.517,100.571 72.682,100.406 72.682,100.401 73.663,99.42 73.668,99.42 75.298,97.79 76.581,97.79 76.699,97.672 76.699,91.83 76.708,91.821 76.708,83.82 77.82,82.708 84.105,82.708 84.201,82.804 84.201,84.221 84.094,84.328 D4.2
RELAY_3: D7.2 U7.19 | length 47.7
  Top Layer w0.15: U7.19 73.584,106.477 72.136,105.029 72.136,100.457 72.332,100.261 72.332,100.256 73.518,99.07 73.523,99.07 75.184,97.409 76.222,97.409 76.349,97.282 76.349,73.257 77.089,72.517 83.859,72.517 83.947,72.605 83.947,73.787 83.82,73.914 D7.2
RELAY_4: D8.2 U7.20 | length 58.9
  Top Layer w0.15: U7.20 73.584,107.112 71.755,105.283 71.755,100.203 75.057,96.901 75.911,96.901 75.999,96.813 75.999,63.32 76.454,62.865 83.947,62.865 84.201,63.119 84.201,64.301 84.113,64.389 D8.2
SCL_1: IC1.6 U6.6 U7.12 | length 25.8
  Top Layer w0.15: U6.6 74.422,109.601 74.295,109.728 74.295,110.529 74.442,110.676 77.001,110.676 77.089,110.588 77.089,106.895 77.331,106.653 79.377,106.653 79.52,106.51 79.52,105.58 79.35,105.41 76.796,105.41 76.708,105.322 76.708,104.902 ; U7.12@75.489,101.93 74.17,101.93 74.082,101.842 74.082,100.981 74.243,100.82 74.248,100.82 74.357,100.711 76.581,100.711 76.708,100.838 76.708,104.902 ; IC1.6 76.835,104.775 76.708,104.902
SCL_2: JP1.3 U7.15 | length 26.8
  Top Layer w0.15: U7.15 73.717,103.861 73.629,103.773 73.629,100.944 73.732,100.841 73.732,100.836 74.098,100.47 74.103,100.47 75.646,98.926 91.701,98.926 92.075,98.552 JP1.3
SDA_1: IC1.5 U6.5 U7.11 | length 12.7
  Top Layer w0.15: U6.5 76.224,110.251 76.312,110.163 76.312,105.776 ; U7.11@75.489,101.27 76.224,101.27 76.312,101.358 76.312,105.776 ; IC1.5 76.581,106.045 76.312,105.776
SDA_2: JP1.2 U7.16 | length 25.3
  Top Layer w0.15: U7.16 73.787,104.521 73.279,104.013 73.279,100.799 73.382,100.696 73.382,100.691 73.953,100.12 73.958,100.12 75.526,98.552 89.154,98.552 89.535,98.171 JP1.2
pads on no net: RL1.2 RL2.2 RL3.2 RL4.2 U7.5 U7.6 U7.8 U7.10 U7.13 U7.14 X1.3

## Polygon pours and split planes (outlines as drawn)
+5V on Top Layer "+5V_L01_P026" (solid, pour order 26): 63.627,113.03 65.151,112.903 65.151,111.252 63.627,111.252 63.5,111.252
GND_A on Top Layer "GND_A_L01_P024" (solid, pour order 24): 23.622,125.222 25.273,126.873 95.885,126.873 97.663,125.095 97.663,41.656 95.885,39.878 57.658,39.878 57.658,111.887 23.749,111.887
12VDC on Top Layer "12VDC_L01_P022" (solid, remove dead copper, pour order 22): 44.45,114.3 44.45,44.45 44.784,44.116 44.831,44.069 45.085,43.815 46.482,42.799 47.498,42.799 48.006,42.799 48.26,42.799 48.133,114.3
GND_A on Top Layer "GND_A_L01_P014" (solid, remove dead copper, pour order 14): 53.975,123.317 56.134,123.317 56.134,125.222 53.975,125.222
GND_A on Top Layer "GND_A_L01_P013" (solid, pour order 13): 53.975,125.222 53.975,118.745 49.022,118.745 49.022,125.222
12VDC on Top Layer "12VDC_L01_P001" (solid, remove dead copper, pour order 1): 38.862,122.174 48.006,122.174 48.006,114.173 42.164,114.173 42.164,114.935 42.164,117.221 38.862,117.221
+5V on Top Layer "+5V_L01_P000" (solid, pour order 0): 73.406,108.458 75.819,108.458 75.819,107.569 73.406,107.569
GND_B on Bottom Layer "GND_B_L02_P020" (solid, pour order 20): 57.658,111.887 57.658,39.878 57.785,40.005 96.012,40.005 97.79,41.783 97.79,111.887
GND_B on Bottom Layer "GND_B_L02_P019" (solid, remove dead copper, pour order 19): 23.484,111.887 23.484,125.211 25.273,127 25.527,126.746 95.885,126.746 97.663,124.968 97.79,111.887
GND_B on Bottom Layer "GND_B_L02_P011" (solid, pour order 11): 65.913,74.295 65.913,110.49 63.373,110.49 63.373,74.353 63.373,74.295
+5V on Bottom Layer "+5V_L02_P009" (solid, pour order 9): 83.058,98.496 87.94,98.496 88.011,98.425 88.011,94.615 83.058,94.615
+5V on Bottom Layer "+5V_L02_P008" (solid, pour order 8): 66.675,100.711 73.025,100.711 73.025,98.552 72.771,98.552 66.675,98.552
+5V on Bottom Layer "+5V_L02_P007" (solid, pour order 7): 73.025,107.569 83.058,107.569 83.058,94.615 73.025,94.615
+5V on Bottom Layer "+5V_L02_P006" (solid, pour order 6): 73.025,110.363 83.058,110.363 83.058,107.569 82.931,107.569 82.677,107.569 73.025,107.569
GND_B on Bottom Layer "GND_B_L02_P004" (solid, pour order 4): 63.373,74.295 63.373,66.548 65.913,66.548 65.913,74.295
GND_B on Bottom Layer "GND_B_L02_P002" (solid, pour order 2): 30.578,125.857 38.227,125.857 38.227,116.042 65.913,116.042 65.913,110.49 57.658,110.49 57.658,111.887 30.401,111.887
no net on Layer 3 (split plane): 97.28,124.884 97.28,41.74 95.801,40.261 25.357,40.261 23.989,41.63 23.989,125.121 25.357,126.49 95.674,126.49
no net on Layer 2 (split plane): 97.28,124.884 97.28,41.74 95.801,40.261 25.357,40.261 23.989,41.63 23.989,125.121 25.357,126.49 95.674,126.49

## Keep-outs
Keep-Out Layer:
  the board outline again, w0.254

## Silkscreen, mask and mechanical layers (free items; w line width, h text height)
Top Overlay:
  text "VCC" at 86.107,93.102 h1.02
  text "SDA" at 88.773,93.102 h1.02
  text "SCL" at 91.44,93.102 h1.02
  text "GND" at 93.853,93.102 h1.02